# Altium PCB PCB.PcbDoc
Units mm, origin at the board's own origin, x right, y up, seen from the top; angles counter-clockwise.
Board outline 101.22 x 32 mm, 2 copper layers (Top Layer, Bottom Layer); 31 components, 17 nets, 95 pads, 4 vias.
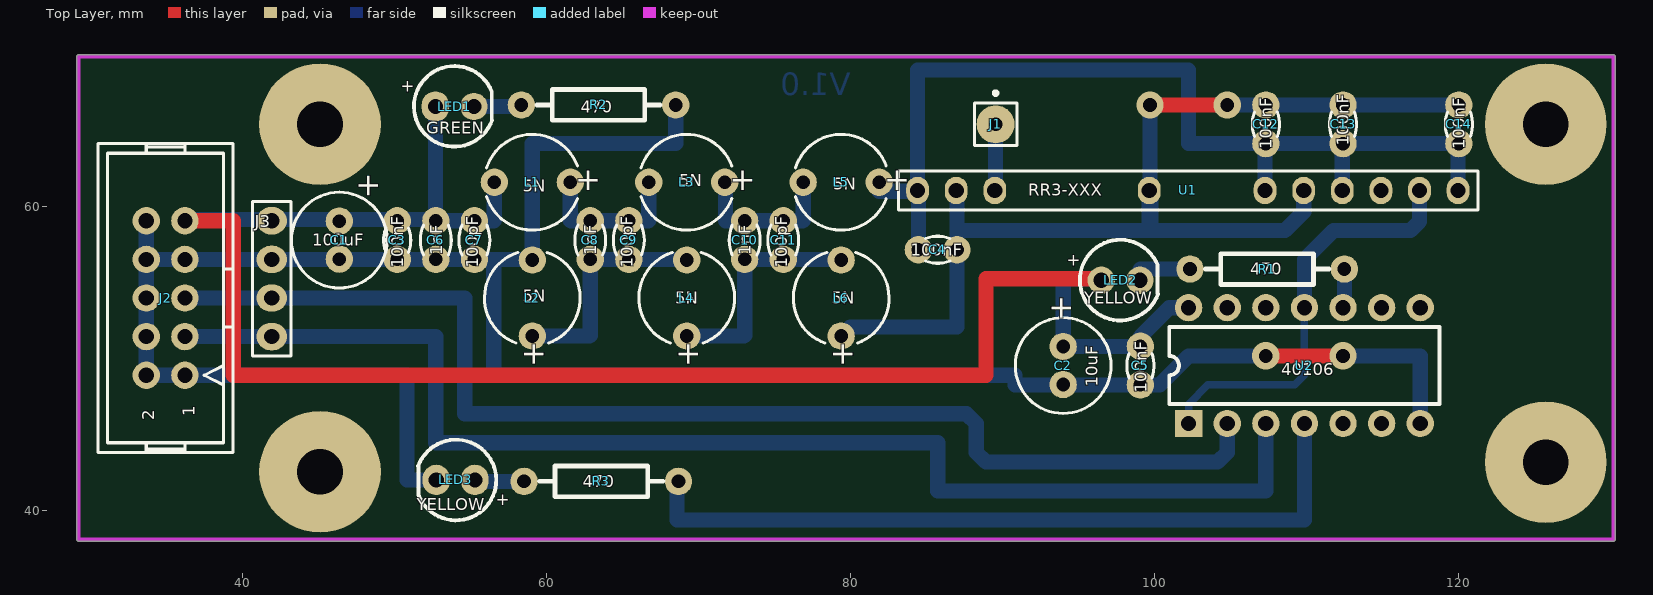
[diagram p0: Top Layer view]
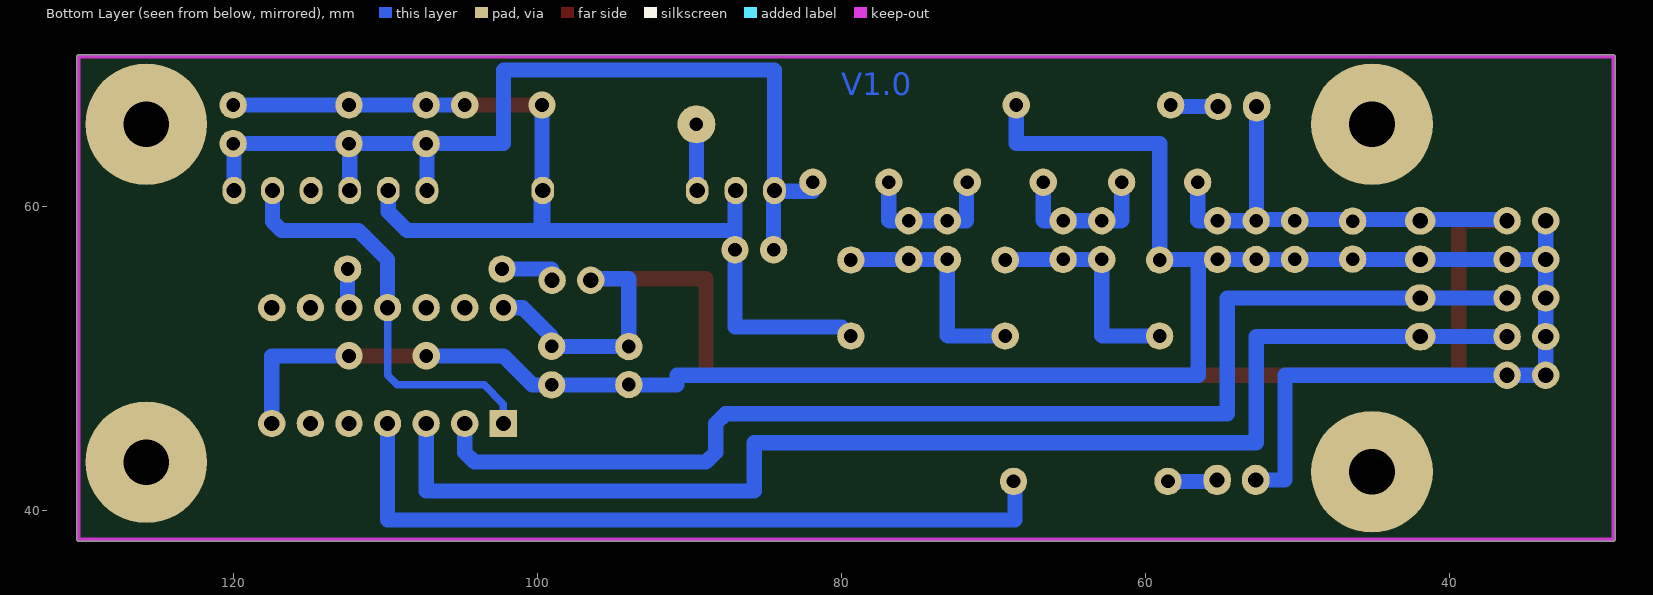
[diagram p1: Bottom Layer view, seen from below]

## Layer stack, top to bottom
Top Solder: solder mask 0.0102, Solder Resist, Dk 3.5
Top Layer: signal copper 0.0356
Dielectric 1: dielectric 0.32, FR-4, Dk 4.8
Bottom Layer: signal copper 0.0356
Bottom Solder: solder mask 0.0102, Solder Resist, Dk 3.5

## Board outline
29.21,37.973 cw(c29.21,38.1) 29.083,38.1 29.083,69.85 cw(c29.21,69.85) 29.21,69.977 130.175,69.977 cw(c130.175,69.85) 130.302,69.85 130.302,38.1 cw(c130.175,38.1) 130.175,37.973

## Design rules (kind name [scope] priority, off if disabled: settings)
Clearance [All] p1: gap=0.254
PolygonConnect [All] p1: connectstyle=Relief reliefconductorwidth=0.254 reliefentries=4 polygonreliefangle="90 Angle" airgapwidth=0.254
RoomDefinition "U_Power Suplay" [InComponentClass('U_Power Suplay')] p1: confinementstyle=ConfineIn formatcopy=TRUE lockcomponents=FALSE outline 0,0 50.8,0 50.8,25.4 0,25.4
RoomDefinition "U_ASK Module_Receiver_RR3-XXX" [InComponentClass('U_ASK Module_Receiver_RR3-XXX')] p2: confinementstyle=ConfineIn formatcopy=TRUE lockcomponents=FALSE outline 0,0 50.8,0 50.8,25.4 0,25.4
RoomDefinition "U_Capacitors Package" [InComponentClass('U_Capacitors Package')] p3: confinementstyle=ConfineIn formatcopy=TRUE lockcomponents=FALSE outline 0,0 50.8,0 50.8,25.4 0,25.4
RoomDefinition Main [InComponentClass('Main')] p4: confinementstyle=ConfineIn formatcopy=TRUE lockcomponents=FALSE outline 31.75,38.735 121.92,38.735 121.92,69.85 31.75,69.85
RoomDefinition U_Filter [InComponentClass('U_Filter')] p5: confinementstyle=ConfineIn formatcopy=TRUE lockcomponents=FALSE outline 50.8,48.895 84.455,48.895 84.455,65.405 50.8,65.405
RoutingVias [All] p1: holewidth=0.711 width=1.27 viastyle="Through Hole" minholewidth=0.711 minwidth=1.27 maxholewidth=0.711 maxwidth=1.27
SolderMaskExpansion [All] p1: expansion=0.102
Width [All] p1: maxlimit=1 minlimit=0.3 preferedwidth=0.5
30 further rules are at their usual default settings.

## Classes and differential pairs
component class "U_Power Suplay": C1 C3 LED1 R2
component class "U_ASK Module_Receiver_RR3-XXX": J1 U1
component class U_Filter: C6 C7 C8 C9 C10 C11 L1 L2 L3 L4 L5 L6
component class Main: C2 C5 J2 J3 LED2 LED3 R1 R3 U2
component class "U_Capacitors Package": C4 C12 C13 C14

## Components (designator, comment, footprint, x,y, rotation, side; value= is the part's Value field where it differs from the comment)
C1 "100uF" CAPPR2.5-6.3x5 46.355,57.785 r270 top
C2 "10uF" CAPPR2.5-6.3x5 93.98,49.53 r270 top
C3 "100nF" CAPNTO2.54-3.05x1.78A 50.165,57.785 r90 top
C4 "100nF" CAPNTO2.54-3.05x1.78A 85.725,57.15 r180 top
C5 "100nF" CAPNTO2.54-3.05x1.78A 99.06,49.53 r90 top
C6 "1nF" CAPNTO2.54-3.56x2.03 52.705,57.785 r90 top
C7 "100pF" CAPNTO2.54-3.56x2.03 55.245,57.785 r90 top
C8 "1nF" CAPNTO2.54-3.56x2.03 62.865,57.785 r90 top
C9 "100pF" CAPNTO2.54-3.56x2.03 65.405,57.785 r90 top
C10 "1nF" CAPNTO2.54-3.56x2.03 73.025,57.785 r90 top
C11 "100pF" CAPNTO2.54-3.56x2.03 75.565,57.785 r90 top
C12 "100nF" CAPNTO2.54-3.05x1.78A 107.315,65.405 r270 top
C13 "100nF" CAPNTO2.54-3.05x1.78A 112.395,65.405 r270 top
C14 "100nF" CAPNTO2.54-3.05x1.78A 120.015,65.405 r270 top
J1 "COAX-F" PIN1 89.535,65.405 r0 top
J2 "Header 5X2" FKV10SN 34.925,53.975 r90 top
J3 "3PIN" HDR1X4 41.91,51.435 r90 top
L1 "5N" CAPPR5-6.3x11 59.055,61.595 r180 top
L2 "5N" CAPPR5-6.3x11 59.055,53.975 r90 top
L3 "5N" CAPPR5-6.3x11 69.215,61.595 r180 top
L4 "5N" CAPPR5-6.3x11 69.215,53.975 r90 top
L5 "5N" CAPPR5-6.3x11 79.375,61.595 r180 top
L6 "5N" CAPPR5-6.3x11 79.375,53.975 r90 top
LED1 "GREEN" LED-5mm_Red#1 53.975,66.675 r0 top
LED2 "YELLOW" LED-5mm_Red#2 97.79,55.245 r0 top
LED3 "YELLOW" LED-5mm_Red#3 53.975,41.91 r180 top
R1 "470" AXIAL-0.4 108.585,55.88 r180 top
R2 "470" AXIAL-0.4 62.23,66.675 r0 top
R3 "470" AXIAL-0.4 64.77,41.91 r180 top
U1 "RR3-XXX" RR3-XXX 100.965,61.05 r0 top
U2 "40106" DIP14 109.855,49.53 r90 top

## Footprints (in the part's own frame and the unit in brackets; to place one, negate y for a bottom-side part, rotate by r counter-clockwise, add the part's x,y. Pads: shape width x height; smd on the part's side, far side on the other; paste and mask are expansions set on the pad)
AXIAL-0.4 [mm]
  round 1.8 hole 0.9: 1(-3.9,0) 2(6.26,0)
  silkscreen extent -2.88,-1.02 5.24,1.02, body extent -4.19,-1.19 6.58,1.12, height 3.51
CAPNTO2.54-3.05x1.78A [mm] "Capacitor, Radial, Tantalum, Non-Polarised; Body 3.05 x 1.78 x 3.43 mm (WxTxH max); Pin Spacing 2.54 mm (typ)"
  round 1.8 hole 0.9: 1(-1.27,0) 2(1.27,0)
  silkscreen extent -0.8,-0.89 0.8,0.89
CAPNTO2.54-3.56x2.03 [mm] "Capacitor, Radial, Tantalum, Non-Polarised; Body 3.56 x 2.03 x 5.08 mm (WxTxH max); Pin Spacing 2.54 mm (typ)"
  round 1.8 hole 0.9: 1(-1.27,0) 2(1.27,0)
  silkscreen extent -0.98,-1.02 0.98,1.02
CAPPR2.5-6.3x5 [mm] "Capacitor, Electrolytic, Radial; Body 6.3 x 5 mm (Dia.xH typ); Pin Spacing 2.5 mm (typ)"
  round 1.8 hole 0.9: 1(-1.25,0) 2(1.25,0)
  silkscreen extent -3.15,-3.15 3.15,3.15
CAPPR5-6.3x11 [mm] "Capacitor, Electrolytic, Radial; Body 6.3 x 11 mm (Dia.xH typ); Pin Spacing 5 mm (typ)"
  round 1.8 hole 0.9: 1(-2.5,0) 2(2.5,0)
  silkscreen extent -2.96,-3.15 3,3.15
DIP14 [mm]
  rect 1.8x1.8 hole 1: 1(-3.81,7.62)
  round 1.8 hole 1: 2(-3.81,5.08) 3(-3.81,2.54) 4(-3.81,0) 5(-3.81,-2.54) 6(-3.81,-5.08) 7(-3.81,-7.62) 8(3.81,-7.62) 9(3.81,-5.08) 10(3.81,-2.54) 11(3.81,0) 12(3.81,2.54) 13(3.81,5.08) 14(3.81,7.62)
  silkscreen extent -2.54,-8.89 2.54,8.89
FKV10SN [mm]
  round 1.8 hole 1: 1(-5.08,-1.27) 2(-5.08,1.27) 3(-2.54,-1.27) 4(-2.54,1.27) 5(0,-1.27) 6(0,1.27) 7(2.54,-1.27) 8(2.54,1.27) 9(5.08,-1.27) 10(5.08,1.27)
  silkscreen extent -10.16,-4.45 10.16,4.45
HDR1X4 [mm]
  oval 1.8x2 hole 1: 1(0,0) 2(2.54,0) 3(5.08,0) 4(7.62,0)
  silkscreen extent -1.27,-1.27 8.89,1.27
LED-5mm_Red#1 [mm]
  oval 1.8x2 hole 1: 1(-1.3,-0.1)
  round 1.8 hole 1: 2(1.24,-0.1)
  silkscreen extent -2.71,-2.74 2.43,2.56, body extent -2.6,-2.64 2.48,2.46, height 9.6
LED-5mm_Red#2 [mm]
  round 1.8 hole 1: 1(-1.3,-0.1) 2(1.24,-0.1)
  silkscreen extent -2.71,-2.74 2.43,2.56, body extent -2.6,-2.64 2.48,2.46, height 9.6
LED-5mm_Red#3 [mm]
  oval 1.8x2 hole 1: 1(-1.3,-0.1) 2(1.24,-0.1)
  silkscreen extent -2.71,-2.74 2.43,2.56, body extent -2.6,-2.64 2.48,2.46, height 9.6
PIN1 [mm]
  round 2.5 hole 0.9: 1(0,0)
  silkscreen extent -1.4,-1.4 1.4,2.17
RR3-XXX [mm]
  oval 1.5x1.8 hole 1: 1(-16.56,0) 2(-14.02,0) 3(-11.48,0) 7(-1.32,0) 10(6.3,0) 11(8.84,0) 12(11.38,0) 13(13.92,0) 14(16.46,0) 15(19,0)
  silkscreen extent -17.83,-1.27 20.32,1.27

## Part data
C1 C2: library part "Cap Pol1", "Polarized Capacitor (Radial)"
C3 C4 C5 C6 C7 C8 C9 C10 C11 C12 C13 C14: library part Cap, "Capacitor"
J1: "Coax-F Connector"
J2: "Header, 5-Pin, Dual row"
J3: library part "Header 4", "Header, 4-Pin"
L1 L2 L3 L4 L5 L6: library part Inductor, "Inductor"
LED1 LED2 LED3: library part LED, "Typical INFRARED GaAs LED"
R1 R2 R3: library part Res1, "Resistor"
U1: "ASK RF Model"
U2: "Hex inverting Schmitt trigger, 14-Pin"

## Free pads (board coordinates)
  round 8 hole 3: 0(45.085,42.545) 0(45.085,65.405) 0(125.73,43.18) 0(125.73,65.405)

## Via types
v1: diameter 1.8, hole 0.9, Top Layer to Bottom Layer, 4 vias

## Nets (pads, with @x,y where several pads share a name; then routed paths per layer and width w, separated by ;. In a path a pad name is that pad's centre, name@x,y a point inside that pad or via, vN(x,y) a via of type N, cw(c..) or ccw(c..) an arc to the next point about the centre after c; other vN are vias at no path point)
+5V: C1.1 C2.1 C3.2 C5.2 C6.2 C7.2 J2.9 J3.4 L1.2 LED1.1 LED2.1 U2.14 | length 123.2
  Top Layer w1: J2.9 39.37,59.055 39.37,48.895 52.705,48.895 88.9,48.895 88.9,55.245 96.45,55.245 96.52,55.175 LED2.1
  Bottom Layer w1: J2.9@36.195,59.145 C6.2@52.615,59.145 ; C6.2@52.675,59.085 LED1.1 ; C6.2 C7.2 56.515,59.055 56.555,59.095 L1.2 ; LED2.1@96.49,55.245 93.98,55.245 C2.1 C5.2@99.06,50.78 ; C5.2 99.06,51.435 100.965,53.34 U2.14@101.6,53.34
GND: C1.2 C2.2 C3.1 C5.1 C6.1 C7.1 J2.1 J2.2 J2.4 J2.6 J2.7 J2.8 J2.10 J3.3 L2.2 LED3.2 R2.2 U2.7 | length 155.7
  Top Layer w1: v1(107.315,50.165) v1(112.395,50.165)
  Bottom Layer w1: J2.10 J2.8 ; J2.8@33.745,56.425 J2.8 ; LED3.2 50.8,42.01 50.8,48.895 J2.1 J2.2 J2.4 J2.6 J2.8 ; L2.2@59.015,56.515 56.515,56.515 ; L2.2 59.055,64.135 68.49,64.135 R2.2 ; v1(107.315,50.165) 102.235,50.165 100.33,48.26 C5.1 90.805,48.26 90.805,48.895 56.515,48.895 56.515,56.515 ; v1(112.395,50.165) 117.475,50.165 U2.7 ; J2.8 C6.1 C7.1 56.515,56.515
LED: J2.3 J3.1 U2.3 | length 85.9
  Bottom Layer w1: J2.3@36.285,51.345 J2.3 52.705,51.435 52.705,44.45 85.725,44.45 85.725,41.275 107.315,41.275 U2.3
NetC4_1: C4.1 C12.1 C13.1 C14.1 L6.1 U1.2 U1.7 U1.11 | length 72.5
  Top Layer w1: v1(99.695,66.675) v1(104.775,66.675)
  Bottom Layer w1: L6.1 79.97,52.07 86.995,52.07 C4.1 86.995,61 U1.2 ; 86.995,58.42 99.645,58.42 U1.7 ; U1.7@99.695,61.1 v1(99.695,66.675) ; U1.7@99.745,60.95 99.745,58.42 108.585,58.42 109.805,59.64 U1.11 ; v1(104.775,66.675) C12.1 C13.1 C14.1
NetC4_2: C4.2 C12.2 C13.2 C14.2 L5.1 U1.1 U1.10 U1.12 U1.15 | length 64.6
  Bottom Layer w1: L5.1 81.875,61 84.355,61 U1.1 ; C4.2 84.455,61 U1.1 ; U1.10 107.265,64.135 102.235,64.135 102.235,68.969 84.405,68.969 U1.1 ; C12.2 C13.2 C14.2 ; U1.12 C13.2@112.345,64.135 ; U1.15 C14.2@119.965,64.135
NetC8_1: C8.1 C9.1 L2.1 L4.2 | length 15.1
  Bottom Layer w1: L2.1 62.825,51.475 62.865,51.515 C8.1 C9.1 L4.2@69.175,56.515
NetC8_2: C8.2 C9.2 L1.1 L3.2 | length 10.2
  Bottom Layer w1: L1.1 61.555,59.095 61.595,59.055 C8.2 C9.2 66.675,59.055 66.715,59.095 L3.2
NetC10_1: C10.1 C11.1 L4.1 L6.2 | length 15.2
  Bottom Layer w1: L4.1 72.985,51.475 73.025,51.515 C10.1 C11.1 79.335,56.515 L6.2
NetC10_2: C10.2 C11.2 L3.1 L5.2 | length 10.2
  Bottom Layer w1: L3.1 71.755,61.555 71.755,59.055 C10.2 C11.2 76.835,59.055 76.875,59.095 L5.2
NetJ1_1: J1.1 U1.3 | length 4.4
  Bottom Layer w1: U1.3 89.535,61.1 J1.1
NetLED1_2: LED1.2 R2.1 | length 3.1
  Bottom Layer w1: LED1.2 R2.1@58.23,66.575 ; R2.1 R2.1@58.42,66.675
NetLED2_2: LED2.2 R1.2 | length 4
  Bottom Layer w1: LED2.2 99.03,55.85 99.06,55.88 R1.2
NetLED3_1: LED3.1 R3.2 | length 3.1
  Bottom Layer w1: LED3.1@55.375,41.91 R3.2
NetR1_1: R1.1 U2.10 | length 2.5
  Bottom Layer w1: U2.10@112.485,53.43 R1.1
NetR3_1: R3.1 U2.4 | length 50.2
  Bottom Layer w1: R3.1 68.58,41.82 68.58,39.37 109.855,39.37 U2.4
TX: U1.14 U2.1 U2.11 | length 27.9
  Bottom Layer w0.5: U2.1 102.235,46.99 103.505,48.26 109.22,48.26 109.855,48.895 U2.11
  Bottom Layer w1: U2.11 109.855,56.515 111.76,58.42 116.84,58.42 117.425,59.005 U1.14
TX_UART: J2.5 J3.2 U2.2 | length 80.8
  Bottom Layer w1: J2.5 54.61,53.975 54.61,46.355 87.63,46.355 88.265,45.72 88.265,43.815 88.9,43.18 104.14,43.18 104.775,43.815 U2.2
pads on no net: U1.13 U2.5 U2.6 U2.8 U2.9 U2.12 U2.13

## Keep-outs
Keep-Out Layer:
  lines w0.254: 29.21,38.1 130.175,38.1 130.175,69.85 29.21,69.85 29.21,38.1

## Other copper
Bottom Layer:
  text "V1.0" at 80.01,67.31 h1.5

## Text inside footprints (layer, text, board x,y; h text height)
C1: Top Overlay "+" at 47.625,62.23 h1.5 r270
C2: Top Overlay "+" at 93.23,54.155 h1.5 r270
J2: Top Overlay "1" at 36.855,46.203 h0.8 r90; Top Overlay "2" at 34.188,45.923 h0.8 r90
L1: Top Overlay "+" at 63.605,62.345 h1.5 r180
L2: Top Overlay "+" at 59.805,49.425 h1.5 r90
L3: Top Overlay "+" at 73.765,62.345 h1.5 r180
L4: Top Overlay "+" at 69.965,49.425 h1.5 r90
L5: Top Overlay "+" at 83.925,62.345 h1.5 r180
L6: Top Overlay "+" at 80.125,49.425 h1.5 r90
LED1: Top Overlay "+" at 50.389,67.54 h0.8
LED2: Top Overlay "+" at 94.204,56.11 h0.8
LED3: Top Overlay "+" at 57.561,41.045 h0.8 r180